# Altium PCB PCB1.PcbDoc
Units mm, origin at the board's own origin, x right, y up, seen from the top; angles counter-clockwise.
Board outline 63.63 x 71.63 mm, 2 copper layers (Top Layer, Bottom Layer), stack 1.57 mm thick; 5 components, 8 nets, 92 pads, 0 vias.
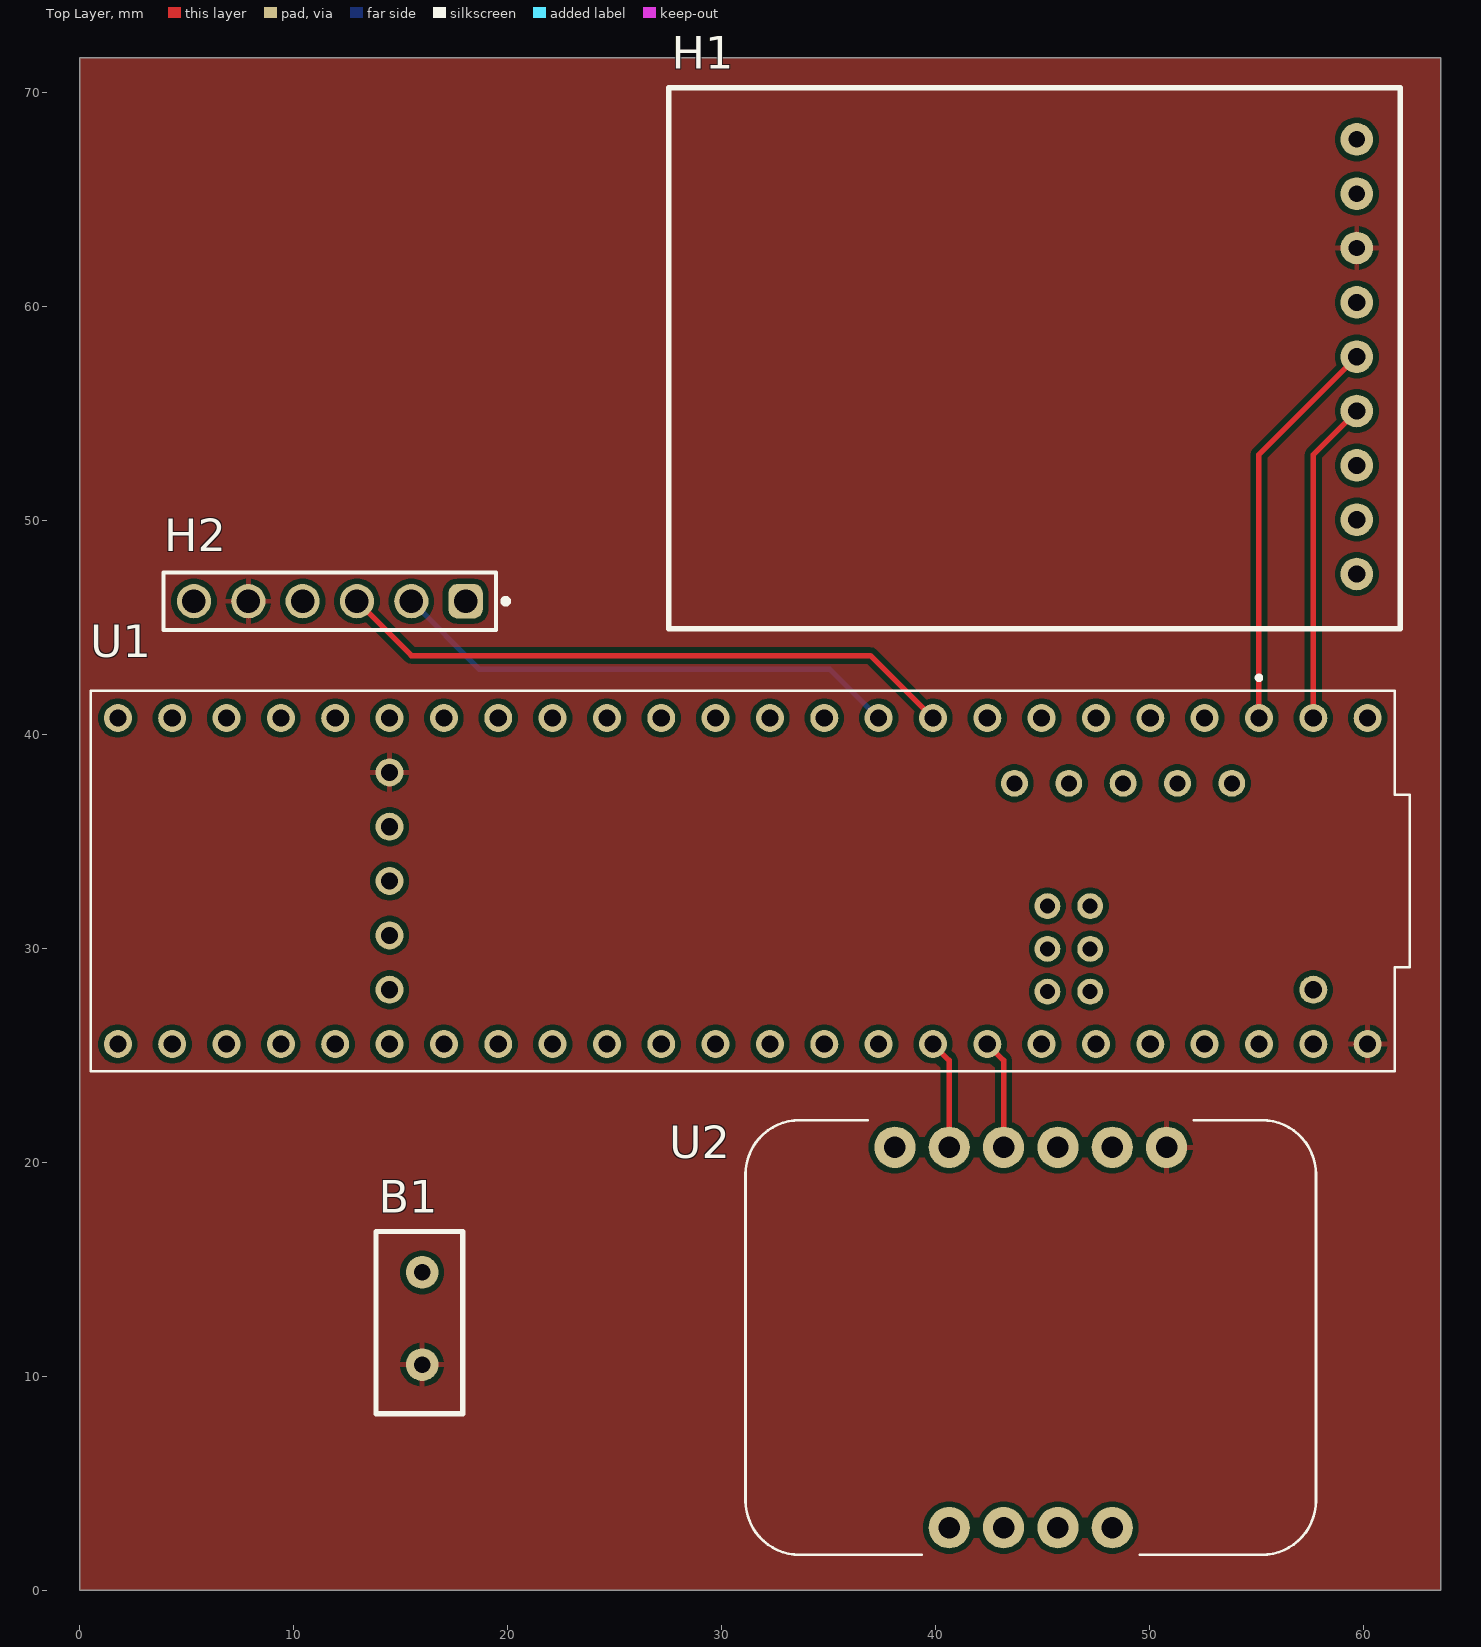
[diagram p0: Top Layer view]
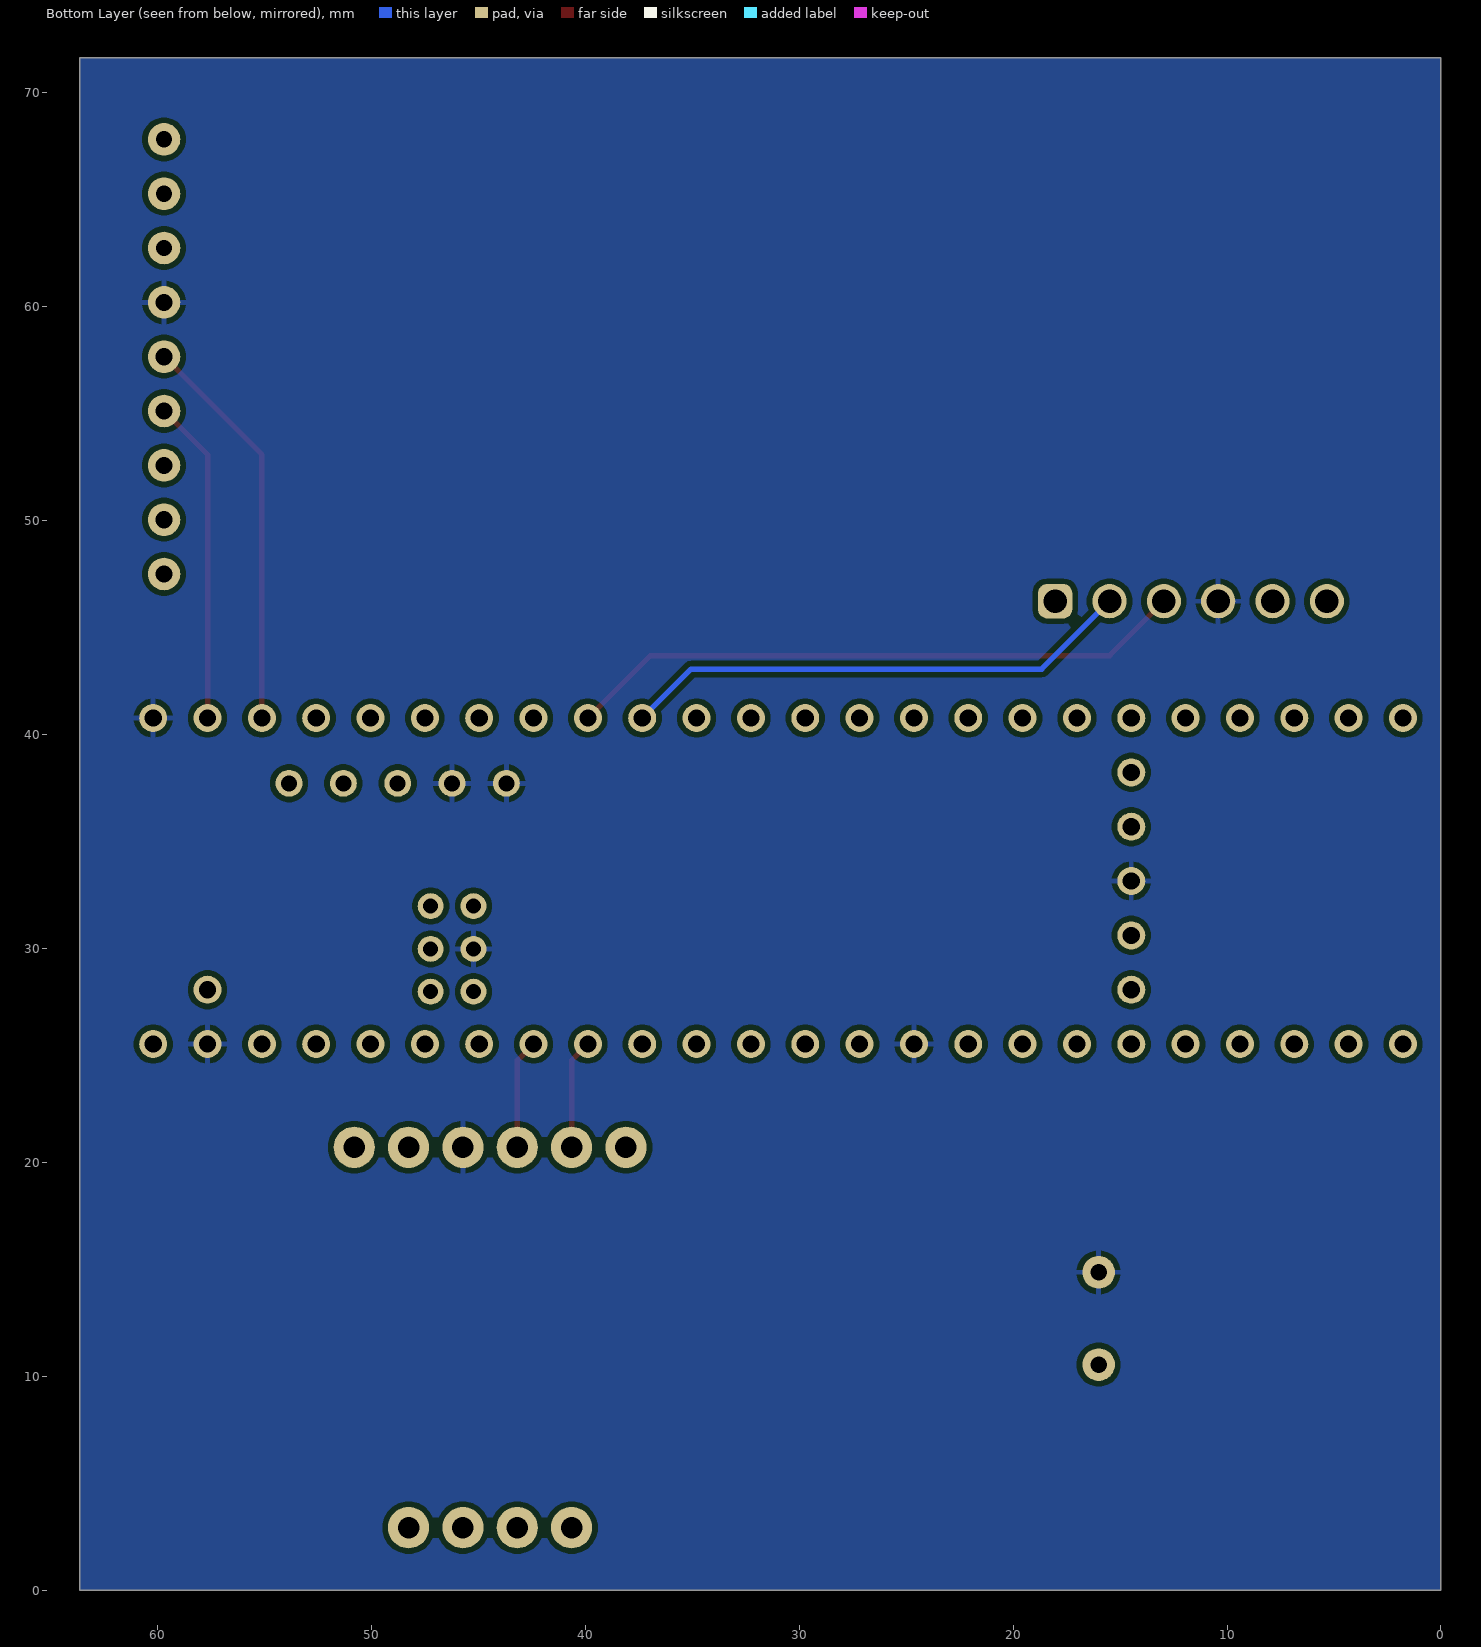
[diagram p1: Bottom Layer view, seen from below]

## Layer stack, top to bottom
Top Solder: solder mask 0.01, Solder Resist, Dk 3.5
Top Layer: signal copper 0.035
Dielectric 1: dielectric 1.5, FR-4, Dk 4.8
Bottom Layer: signal copper 0.035
Bottom Solder: solder mask 0.01, Solder Resist, Dk 3.5

## Board outline
0,0 63.627,0 63.627,71.628 0,71.628

## Design rules (kind name [scope] priority, off if disabled: settings)
Clearance [All] p1: gap=0.254 ignorepadtopadclearanceinfootprint=FALSE except(0.762: Arc-Arc Arc-Track Track-Track)
PolygonConnect [All] p1: connectstyle=Relief reliefconductorwidth=0.254 reliefentries=4 polygonreliefangle="90 Angle" airgapwidth=0.254
RoutingVias [All] p1: holewidth=0.711 width=1.27 viastyle="Through Hole" minholewidth=0.711 minwidth=1.27 maxholewidth=0.711 maxwidth=1.27
SolderMaskExpansion [All] p1: expansion=0.102 istentingtop=FALSE
SupplyNets "Schematic Supply Nets_1" [InNet('VIN')] p1: voltage=0.000
SupplyNets "Schematic Supply Nets" [InNet('GND')] p2: voltage=0.000
Width [All] p1: maxlimit=0.254 minlimit=0.254 preferedwidth=0.254
30 further rules are at their usual default settings.

## Components (designator, comment, footprint, x,y, rotation, side; value= is the part's Value field where it differs from the comment)
B1 "3_CELL_BATTEREY" 3_CELL_BATTEREY 16.002,12.573 r90 top
H1 "GPS" 9X1_HEADER 59.817,50.165 r90 top
H2 "Bluetooth" 61300611121 11.684,46.228 r180 top
U1 "TEENSY 4.1" MODULE_DEV-16771 30.988,33.147 r180 top
U2 "BNO055" MODULE_2472 44.45,11.811 r180 top

## Footprints (in the part's own frame and the unit in brackets; to place one, negate y for a bottom-side part, rotate by r counter-clockwise, add the part's x,y. Pads: shape width x height; smd on the part's side, far side on the other; paste and mask are expansions set on the pad)
3_CELL_BATTEREY [mil]
  round 60 hole 30: 0(-80,0) 1(90,0)
  silkscreen extent -170,-75 165,85
9X1_HEADER [mil]
  round 60 hole 31.5: 1(-105,5) 2(-5,5) 3(95,5) 4(195,5) 5(295,5) 6(395,5)
  round 60 hole 30: 7(495,5) 8(595,5) 9(695,5)
  silkscreen extent -206,-75 790,1271
61300611121 [mm] "Pin Header, pitch 2.54 mm, THT, Vertical, single row, 6p"
  rrect50% 1.6x1.6 hole 1.1: 1(-6.35,0)
  round 1.6 hole 1.1: 2(-3.81,0) 3(-1.27,0) 4(1.27,0) 5(3.81,0) 6(6.35,0)
  silkscreen extent -8.34,-1.35 7.77,1.35, body extent -7.62,-1.27 7.62,1.27, height 8.57
MODULE_2472 [mil]
  round 76 hole 39.37: 1(-250,-350) 2(-150,-350) 3(-50,-350) 4(50,-350) 5(150,-350) 6(250,-350) 7(150,350) 8(50,350) 9(-50,350) 10(-150,350)
  silkscreen extent -525,-400 525,400
MODULE_DEV-16771 [mm]
  round 1.308 hole 0.8: 0(-26.67,-7.62) 1(-24.13,-7.62) 2(-21.59,-7.62) 3(-19.05,-7.62) 3.3V_1(6.35,-7.62) 3.3V_2(-24.13,7.62) 3.3V_3(16.51,-2.54) 4(-16.51,-7.62) 5(-13.97,-7.62) 6(-11.43,-7.62) 7(-8.89,-7.62) 8(-6.35,-7.62) 9(-3.81,-7.62) 10(-1.27,-7.62) 11(1.27,-7.62) 12(3.81,-7.62) 13(3.81,7.62) 14(1.27,7.62) 15(-1.27,7.62) 16(-3.81,7.62) 17(-6.35,7.62) 18(-8.89,7.62) 19(-11.43,7.62) 20(-13.97,7.62) 21(-16.51,7.62) 22(-19.05,7.62) 23(-21.59,7.62) 24(8.89,-7.62) 25(11.43,-7.62) 26(13.97,-7.62) 27(16.51,-7.62) 28(19.05,-7.62) 29(21.59,-7.62) 30(24.13,-7.62) 31(26.67,-7.62) 32(29.21,-7.62) 33(29.21,7.62) 34(26.67,7.62) 35(24.13,7.62) 36(21.59,7.62) 37(19.05,7.62) 38(16.51,7.62) 39(13.97,7.62) 40(11.43,7.62) 41(8.89,7.62) GND1(-29.21,-7.62) GND2(6.35,7.62) GND3(-26.67,7.62) GND4(16.51,0) ON/OFF(16.51,5.08) PROGRAM(16.51,2.54) VBAT(16.51,-5.08) VIN(-29.21,7.62) VUSB(-26.67,5.08)
  round 1.258 hole 0.75: 5V(-22.86,-4.57) D+(-17.78,-4.57) D-(-20.32,-4.57) USB_GND1(-15.24,-4.57) USB_GND2(-12.7,-4.57)
  round 1.208 hole 0.7: GND5(-14.24,3.17) LED(-16.24,3.17) R+(-16.24,5.17) R-(-14.24,5.17) T+(-14.24,1.17) T-(-16.24,1.17)
  silkscreen extent -31.18,-9.6 30.48,8.89

## Part data
H1: library part 9x1_header
U1: library part DEV-16771_1, "RT1062 Teensy 4.1 series ARM® Cortex®-M7 MPU Embedded Evaluation Board", Package=None, Check_prices=https://www.snapeda.com/parts/DEV-16771/SparkFun+Electronics/view-part/?ref=eda, MF="SparkFun Electronics", MP=DEV-16771, SnapEDA_Link=https://www.snapeda.com/parts/DEV-16771/SparkFun+Electronics/view-part/?ref=snap
U2: library part 2472, "Adafruit 9-DOF Absolute Orientation IMU Fusion Breakout - BNO055", Package="Non-Standard Adafruit", Check_prices=https://www.snapeda.com/parts/2472/Adafruit+Industries/view-part/?ref=eda, MF=Adafruit, MP=2472, SnapEDA_Link=https://www.snapeda.com/parts/2472/Adafruit+Industries/view-part/?ref=snap

## Nets (pads, with @x,y where several pads share a name; then routed paths per layer and width w, separated by ;. In a path a pad name is that pad's centre, name@x,y a point inside that pad or via, vN(x,y) a via of type N, cw(c..) or ccw(c..) an arc to the next point about the centre after c; other vN are vias at no path point)
GND: B1.1 H1.6 H2.4 U1.GND1 U1.GND2 U1.GND3 U1.GND4 U1.GND5 U1.USB_GND1 U1.USB_GND2 U2.3
RX_BLUE: H2.2 U1.8 | length 24.1
  Bottom Layer w0.254: H2.2 18.669,43.053 35.052,43.053 U1.8
RX_GPS: H1.5 U1.1 | length 18.8
  Top Layer w0.254: U1.1 55.118,53.086 H1.5
SCL_IMU: U1.18 U2.5 | length 5.1
  Top Layer w0.254: U1.18 40.64,24.765 U2.5
SDA_IMU: U1.19 U2.4 | length 5.1
  Top Layer w0.254: U1.19 43.18,24.765 U2.4
TX_BLUE: H2.3 U1.7 | length 29.2
  Top Layer w0.254: H2.3 15.494,43.688 36.957,43.688 U1.7
TX_GPS: H1.4 U1.0 | length 15.2
  Top Layer w0.254: U1.0 57.658,53.086 H1.4
VIN: B1.0 H1.7 H2.5 U1.VBAT U1.VIN U2.1
pads on no net: H1.1 H1.2 H1.3 H1.8 H1.9 H2.1 H2.6 U1.2 U1.3 U1.3.3V_1 U1.3.3V_2 U1.3.3V_3 U1.4 U1.5 U1.5V U1.6 U1.9 U1.10 U1.11 U1.12 U1.13 U1.14 U1.15 U1.16 U1.17 U1.20 U1.21 U1.22 U1.23 U1.24 U1.25 U1.26 U1.27 U1.28 U1.29 U1.30 U1.31 U1.32 U1.33 U1.34 U1.35 U1.36 U1.37 U1.38 U1.39 U1.40 U1.41 U1.D+ U1.D- U1.LED U1.ON/OFF U1.PROGRAM U1.R+ U1.R- U1.T+ U1.T- U1.VUSB U2.2 U2.6 U2.7 U2.8 U2.9 U2.10

## Polygon pours and split planes (outlines as drawn)
VIN on Top Layer "VIN_L01_P000" (solid, pour order 0): 0,71.628 63.627,71.628 63.627,0 0,0
GND on Bottom Layer "GND_L02_P001" (solid, pour order 1): 0,71.628 63.627,71.628 63.627,0 0,0

## Silkscreen, mask and mechanical layers (free items; w line width, h text height)
Layer StackUp:
  lines w0.381: 101.238,53.657 111.65,53.657 135.265,53.657 157.103,53.657 173.609,53.657 188.083,53.657 200.019,53.657 ; 101.238,56.706 111.65,56.706 135.265,56.706 157.103,56.706 173.609,56.706 188.083,56.706 200.019,56.706 ; 101.238,59.753 111.65,59.753 135.265,59.753 157.103,59.753 173.609,59.753 188.083,59.753 200.019,59.753 ; 101.238,62.801 111.65,62.801 135.265,62.801 157.103,62.801 173.609,62.801 188.083,62.801 200.019,62.801 ; 101.238,65.849 111.65,65.849 135.265,65.849 157.103,65.849 173.609,65.849 188.083,65.849 200.019,65.849 ; 101.238,68.897 111.65,68.897 135.265,68.897 157.103,68.897 173.609,68.897 188.083,68.897 200.019,68.897 ; 101.238,71.945 200.019,71.945 ; 111.65,74.993 111.65,50.609 ; 135.265,74.993 135.265,50.609 ; 157.103,74.993 157.103,50.609 ; 173.609,74.993 173.609,50.609 ; 188.083,74.993 188.083,50.609 ; 111.65,50.609 101.238,50.609 101.238,74.993 200.019,74.993 200.019,50.609 188.083,50.609 ; 111.65,50.609 135.265,50.609 ; 135.265,50.609 157.103,50.609 ; 157.103,50.609 173.609,50.609 ; 173.609,50.609 188.083,50.609
  text "Layer" at 103.016,72.707 h1.52
  text "Name" at 113.428,72.707 h1.52
  text "Material" at 137.043,72.707 h1.52
  text "Thickness" at 158.881,72.707 h1.52
  text "Constant" at 175.387,72.707 h1.52
  text "Gerber" at 189.861,72.707 h1.52
  text "Top Overlay" at 113.428,69.659 h1.52
  text "GTO" at 189.861,69.659 h1.52
  text "Top Solder" at 113.428,66.611 h1.52
  text "Solder Resist" at 137.043,66.611 h1.52
  text "0.010mm" at 158.881,66.611 h1.52
  text "3.5" at 175.387,66.611 h1.52
  text "GTS" at 189.861,66.611 h1.52
  text "1" at 103.016,63.563 h1.52
  text "Top Layer" at 113.428,63.563 h1.52
  text "0.035mm" at 158.881,63.563 h1.52
  text "GTL" at 189.861,63.563 h1.52
  text "Dielectric 1" at 113.428,60.515 h1.52
  text "FR-4" at 137.043,60.515 h1.52
  text "1.500mm" at 158.881,60.515 h1.52
  text "4.8" at 175.387,60.515 h1.52
  text "2" at 103.016,57.468 h1.52
  text "Bottom Layer" at 113.428,57.468 h1.52
  text "0.035mm" at 158.881,57.468 h1.52
  text "GBL" at 189.861,57.468 h1.52
  text "Bottom Solder" at 113.428,54.419 h1.52
  text "Solder Resist" at 137.043,54.419 h1.52
  text "0.010mm" at 158.881,54.419 h1.52
  text "3.5" at 175.387,54.419 h1.52
  text "GBS" at 189.861,54.419 h1.52
  text "Bottom Overlay" at 113.428,51.371 h1.52
  text "GBO" at 189.861,51.371 h1.52
  text "Total board thickness:" at 103.016,48.323 h1.52
  text "1.590mm" at 158.881,48.323 h1.52
Board Outline:
  the board outline again, w0.254
Drill Drawing:
  circle w0.254: c103.054,20.278 r0.847
  lines w0.254: 102.207,23.241 103.054,23.664 103.901,23.241 103.477,24.088 103.901,24.934 103.054,24.511 102.207,24.934 102.631,24.088 102.207,23.241 ; 102.207,27.051 102.207,27.474 102.631,27.898 102.207,28.321 102.207,28.744 102.631,28.744 103.054,28.321 103.477,28.744 103.901,28.744 103.901,28.321 103.477,27.898 103.901,27.474 103.901,27.051 103.477,27.051 103.054,27.474 102.631,27.051 102.207,27.051 ; 102.207,32.554 103.901,32.554 103.054,30.861 102.207,32.554 ; 102.207,34.671 103.901,34.671 103.901,36.364 102.207,36.364 102.207,34.671 ; 102.207,38.904 102.631,38.904 103.054,38.481 103.477,38.904 103.901,38.904 103.477,39.328 103.901,39.751 103.477,39.751 103.054,40.174 102.631,39.751 102.207,39.751 102.631,39.328 102.207,38.904
  lines w0.381: 100.689,18.288 366.909,18.288 ; 100.689,41.148 366.909,41.148 ; 114.681,14.478 114.681,44.958 ; 128.393,14.478 128.393,44.958 ; 156.325,14.478 156.325,44.958 ; 169.175,14.478 169.175,44.958 ; 187.813,14.478 187.813,44.958 ; 225.902,14.478 225.902,44.958 ; 240.884,14.478 240.884,44.958 ; 259.827,14.478 259.827,44.958 ; 276.333,14.478 276.333,44.958 ; 298.018,14.478 298.018,44.958 ; 331.892,14.478 331.892,44.958 ; 100.689,14.478 366.909,14.478 366.909,44.958 100.689,44.958 100.689,14.478
  text "Symbol" at 102.975,42.291 h1.83
  text "Count" at 115.824,42.291 h1.83
  text "Hole Size" at 129.536,42.291 h1.83
  text "Plated" at 157.468,42.291 h1.83
  text "Hole Type" at 170.318,42.291 h1.83
  text "Drill Layer Pair" at 188.956,42.291 h1.83
  text "Via/Pad" at 227.045,42.291 h1.83
  text "Pad Shape" at 242.027,42.291 h1.83
  text "Template" at 260.97,42.291 h1.83
  text "Description" at 277.476,42.291 h1.83
  text "Hole Tolerance (+)" at 299.161,42.291 h1.83
  text "Hole Tolerance (-)" at 333.035,42.291 h1.83
  text "5" at 115.824,38.481 h1.52
  text "0.750mm (29.53mil)" at 129.536,38.481 h1.52
  text "PTH" at 157.468,38.481 h1.52
  text "Round" at 170.318,38.481 h1.52
  text "Top Layer - Bottom Layer" at 188.956,38.481 h1.52
  text "Pad" at 227.045,38.481 h1.52
  text "Rounded" at 242.027,38.481 h1.52
  text "c126h75" at 260.97,38.481 h1.52
  text "5" at 115.824,34.671 h1.52
  text "0.762mm (30.00mil)" at 129.536,34.671 h1.52
  text "PTH" at 157.468,34.671 h1.52
  text "Round" at 170.318,34.671 h1.52
  text "Top Layer - Bottom Layer" at 188.956,34.671 h1.52
  text "Pad" at 227.045,34.671 h1.52
  text "Rounded" at 242.027,34.671 h1.52
  text "c152h76" at 260.97,34.671 h1.52
  text "6" at 115.824,30.861 h1.52
  text "0.700mm (27.56mil)" at 129.536,30.861 h1.52
  text "PTH" at 157.468,30.861 h1.52
  text "Round" at 170.318,30.861 h1.52
  text "Top Layer - Bottom Layer" at 188.956,30.861 h1.52
  text "Pad" at 227.045,30.861 h1.52
  text "Rounded" at 242.027,30.861 h1.52
  text "c121h70" at 260.97,30.861 h1.52
  text "6" at 115.824,27.051 h1.52
  text "1.100mm (43.31mil)" at 129.536,27.051 h1.52
  text "PTH" at 157.468,27.051 h1.52
  text "Round" at 170.318,27.051 h1.52
  text "Top Layer - Bottom Layer" at 188.956,27.051 h1.52
  text "Pad" at 227.045,27.051 h1.52
  text "(Mixed)" at 242.027,27.051 h1.52
  text "(Mixed)" at 260.97,27.051 h1.52
  text "10" at 115.824,23.241 h1.52
  text "1.000mm (39.37mil)" at 129.536,23.241 h1.52
  text "PTH" at 157.468,23.241 h1.52
  text "Round" at 170.318,23.241 h1.52
  text "Top Layer - Bottom Layer" at 188.956,23.241 h1.52
  text "Pad" at 227.045,23.241 h1.52
  text "Rounded" at 242.027,23.241 h1.52
  text "c193h100" at 260.97,23.241 h1.52
  text "60" at 115.824,19.431 h1.52
  text "0.800mm (31.50mil)" at 129.536,19.431 h1.52
  text "PTH" at 157.468,19.431 h1.52
  text "Round" at 170.318,19.431 h1.52
  text "Top Layer - Bottom Layer" at 188.956,19.431 h1.52
  text "Pad" at 227.045,19.431 h1.52
  text "Rounded" at 242.027,19.431 h1.52
  text "(Mixed)" at 260.97,19.431 h1.52
  text "92 Total" at 115.824,15.621 h1.52

## Dimensions
63.627,71.628 to 63.627,0 on Diemensions
0,0 to 63.627,0 on Diemensions

## Text inside footprints (layer, text, board x,y; h text height)
U1: Mechanical 13 "Teensy 4.1" at 31.238,32.807 h1.27 r180